# Altium PCB PCB.PcbDoc (part 2 of 2)
Units mm, origin at the board's own origin, x right, y up, seen from the top; angles counter-clockwise.
Board outline 148 x 108 mm, 2 copper layers (Top Layer, Bottom Layer); 136 components, 143 nets, 391 pads, 164 vias.
Unrouted connection lines stored in the file: 1.
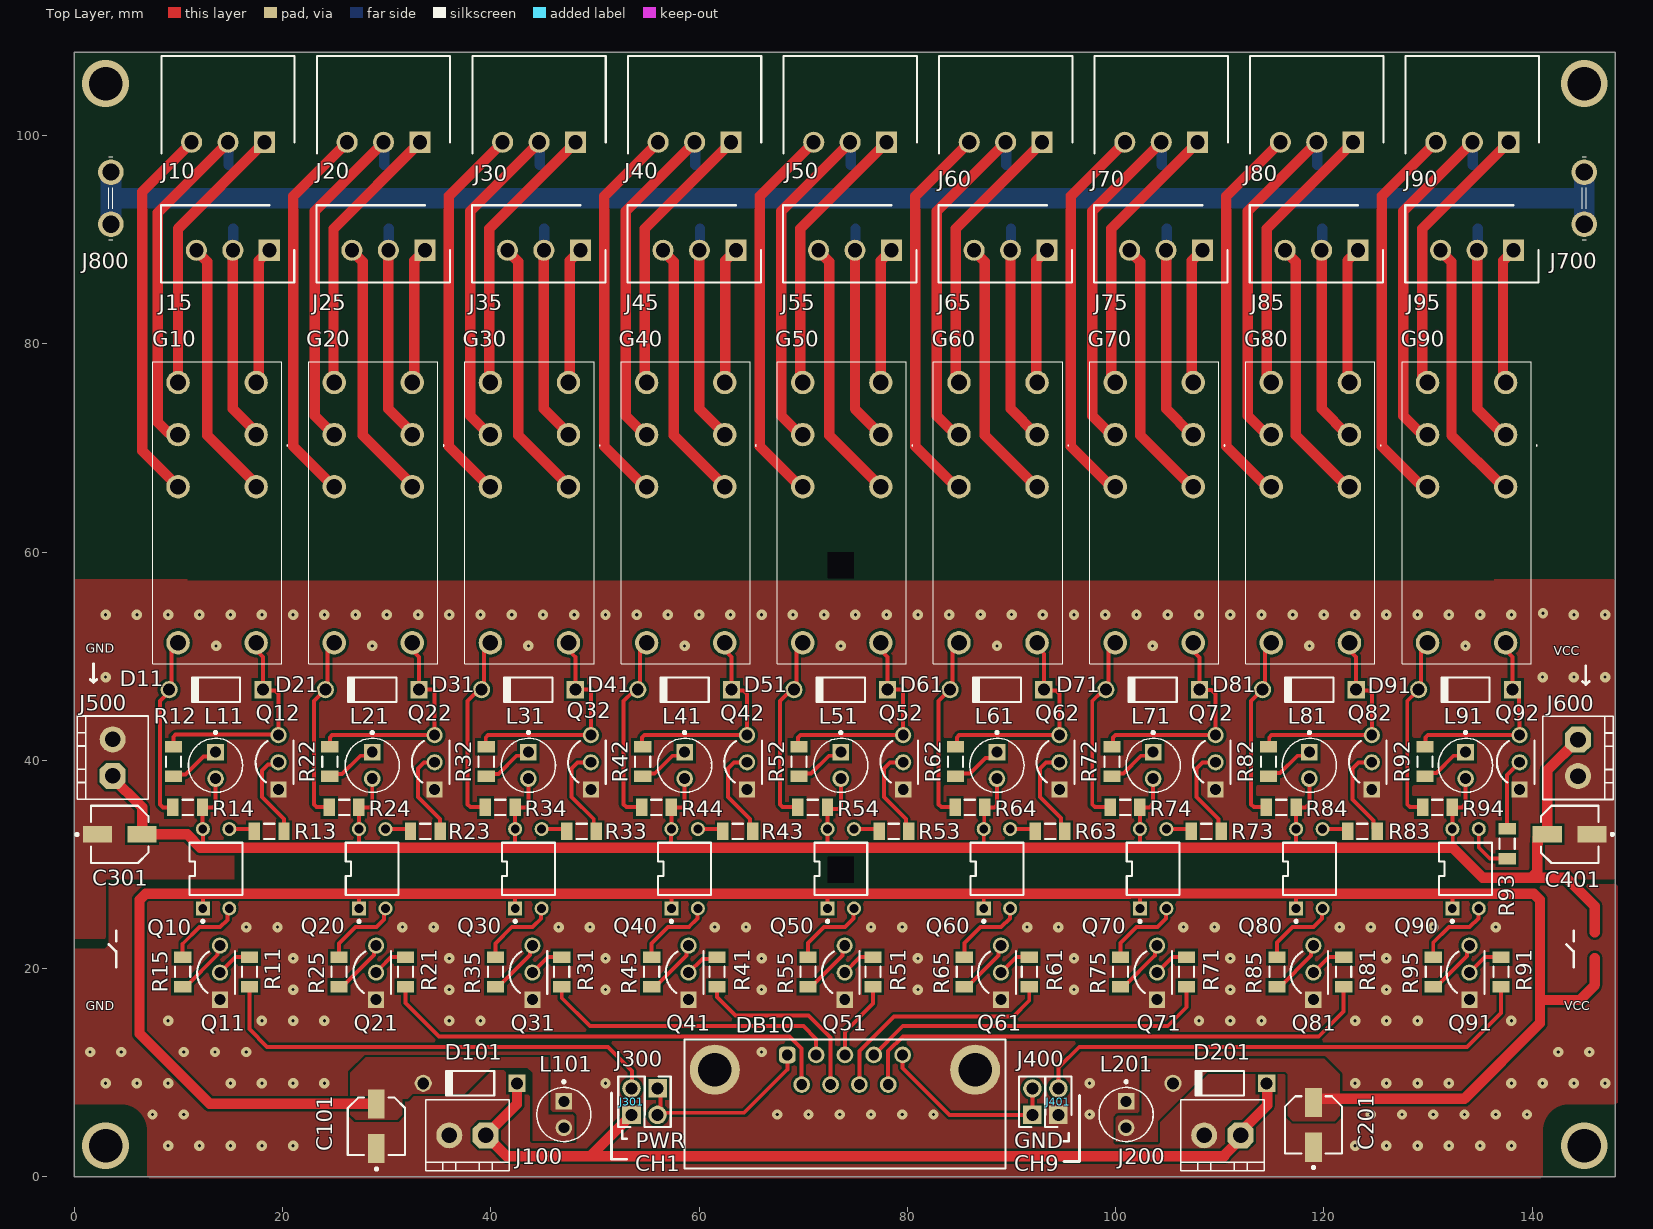
[diagram p0: Top Layer view]

## Silkscreen, mask and mechanical layers (free items; w line width, h text height) (continued)
Top Solder: (continued)
  rectangle: 145.5,23.35 146.5,25.6
  rectangle: 145.5,18.75 146.5,21
Bottom Solder:
  rectangle: 130.8,93 138.7,95
  rectangle: 115.8,93 123.7,95
  rectangle: 100.9,93 108.8,95
  rectangle: 85.9,93 93.8,95
  rectangle: 71,93 78.9,95
  rectangle: 56.1,93 64,95
  rectangle: 41.2,93 49.1,95
  rectangle: 26.2,93 34.1,95
  rectangle: 11.3,93 19.2,95

## Text inside footprints (layer, text, board x,y; h text height)
DB10: Mechanical 2 "PCB Edge" at 70.6,-0.82 h1.02